# EAGLE board Creative Project (EAGLE 7.6.0)

Size 73.58 x 63.39 mm. Coordinates in mm from the lower left corner, seen from the top.
Outline: 0,0 56.82,0 56.82,53.33 0,53.33 0,0
Copper layers (1*16): Top 0.035mm / dielectric 1.5mm / Bottom 0.035mm
Design rules "default": minimum track width 10mil, minimum drill 24mil, track to track 8mil, track to pad 8mil, pad to pad 8mil, via to via 8mil, smd to smd 8mil, copper to edge 40mil, drill to drill 8mil, minimum pad ring 10mil, minimum via ring 8mil, stop-mask expansion 4mil, vias tented up to drill 0mil, thermal gap 10mil

## Footprints (pad centres in the part's own frame; a part is rotated, then mirrored left to right if it is on the bottom)
LED5MM = drill 0.813 octagon: A -1.27,0; K 1.27,0
0207/10 = drill 0.813 octagon: 1 -5.08,0; 2 5.08,0
TL1105 = drill 1 pad 1.676: 1 -2.25,3.25; 2 2.25,3.25; 3 -2.25,-3.25; 4 2.25,-3.25
ARDUINO_UNO = drill 1.016 pad 1.88: 0 63.5,50.8; 1 60.96,50.8; 2 58.42,50.8; 3 55.88,50.8; 3.3V 35.56,2.54; 4 53.34,50.8; 5 50.8,50.8; 5V 38.1,2.54; 6 48.26,50.8; 7 45.72,50.8; 8 41.656,50.8; 9 39.116,50.8; 10 36.576,50.8; 11 34.036,50.8; 12 31.496,50.8; 13 28.956,50.8; A0 50.8,2.54; A1 53.34,2.54; A2 55.88,2.54; A3 58.42,2.54; A4 60.96,2.54; A5 63.5,2.54; AREF 23.876,50.8; GND 26.416,50.8; GND. 43.18,2.54; GND.. 40.64,2.54; I/OREF 30.48,2.54; N/C 27.94,2.54; RESET 33.02,2.54; SCL 18.796,50.8; SDA 21.336,50.8; VIN 45.72,2.54 | hole 3.2: 66.04,7.62; 66.04,35.56; 15.24,50.8; 13.97,2.54
TO92 = drill 0.813 octagon: 1 1.27,0; 2 0,1.905; 3 -1.27,0

## Placement (x,y rotation side)
D1  [LED5MM]  5,327.58 0 top  (outside the outline)
D2  [LED5MM]  5,86.28 0 top  (outside the outline)
D3  [LED5MM]  5,98.98 0 top  (outside the outline)
D4  [LED5MM]  5,111.68 0 top  (outside the outline)
D5  [LED5MM]  5,124.38 0 top  (outside the outline)
DAlien  [LED5MM]  5,22.78 0 top
DHuman  [LED5MM]  5,35.48 0 top
R1  1k‎Ω  [0207/10]  5,48.18 0 top
R2  1k‎Ω  [0207/10]  5,60.88 0 top
R3  1k‎Ω  [0207/10]  5,289.48 0 top  (outside the outline)
R4  1k‎Ω  [0207/10]  5,187.88 0 top  (outside the outline)
R5  1k‎Ω  [0207/10]  5,200.58 0 top  (outside the outline)
R6  1k‎Ω  [0207/10]  5,213.28 0 top  (outside the outline)
R7  1k‎Ω  [0207/10]  5,225.98 0 top  (outside the outline)
R8  1k‎Ω  [0207/10]  5,314.88 0 top  (outside the outline)
R9  1k‎Ω  [0207/10]  5,238.68 0 top  (outside the outline)
R10  1k‎Ω  [0207/10]  5,251.38 0 top  (outside the outline)
R11  1k‎Ω  [0207/10]  5,264.08 0 top  (outside the outline)
R12  1k‎Ω  [0207/10]  5,276.78 0 top  (outside the outline)
S1  [TL1105]  5,302.18 0 top  (outside the outline)
S2  [TL1105]  5,137.08 0 top  (outside the outline)
S3  [TL1105]  5,149.78 0 top  (outside the outline)
S4  [TL1105]  5,162.48 0 top  (outside the outline)
S5  [TL1105]  5,175.18 0 top  (outside the outline)
U1  [ARDUINO_UNO]  5,10.08 0 top
U2  [TO92]  5,73.58 0 top  (outside the outline)

## Library data of the parts
D1-D5 DAlien DHuman R1-R12 S1-S5 U1 U2 = AUTODESK_CIRCUITS_BREADBOARD

## Nets
N$1: DAlien.K R2.2
N$2: DHuman.K R1.2
N$3: DHuman.A U1.2
N$4: DAlien.A U1.3
N$5: U1.A0 U2.2
N$6: R1.1 R2.1 R3.1 R4.1 R5.1 R6.1 R7.1 R8.2 R9.2 R10.2 R11.2 R12.2 U1.GND.. U2.1
N$7: S1.2
N$8: S2.2
N$9: S3.2
N$10: S4.2
N$11: S5.2
N$12: S1.4 S2.4 S3.4 S4.4 S5.4 U1.5V U2.3
N$13: S5.1
N$14: R7.2 S5.3 U1.9
N$15: S4.1
N$16: R6.2 S4.3 U1.10
N$17: S3.1
N$18: R5.2 S3.3 U1.11
N$19: S2.1
N$20: R4.2 S2.3 U1.12
N$21: S1.1
N$22: R3.2 S1.3 U1.13
N$23: D1.K R8.1
N$24: D2.K R9.1
N$25: D2.A U1.7
N$26: D3.K R10.1
N$27: D3.A U1.6
N$28: D4.K R11.1
N$29: D4.A U1.5
N$30: D5.K R12.1
N$31: D5.A U1.4
N$32: D1.A U1.8

## Tracks (layer width: path | path; a pad name or v marks a point on that pad's centre or on a via)
N$1  (1 unrouted)
N$2  (1 unrouted)
N$3  (1 unrouted)
N$4  (1 unrouted)
N$5  (1 unrouted)
N$6  (13 unrouted)
N$12  (6 unrouted)
N$14  (2 unrouted)
N$16  (2 unrouted)
N$18  (2 unrouted)
N$20  (2 unrouted)
N$22  (2 unrouted)
N$23  (1 unrouted)
N$24  (1 unrouted)
N$25  (1 unrouted)
N$26  (1 unrouted)
N$27  (1 unrouted)
N$28  (1 unrouted)
N$29  (1 unrouted)
N$30  (1 unrouted)
N$31  (1 unrouted)
N$32  (1 unrouted)